# Altium PCB PCB1.PcbDoc
Units mm, origin at the board's own origin, x right, y up, seen from the top; angles counter-clockwise.
Board outline 150 x 150 mm, 2 copper layers (Top Layer, Bottom Layer); 67 components, 50 nets, 212 pads, 48 vias.
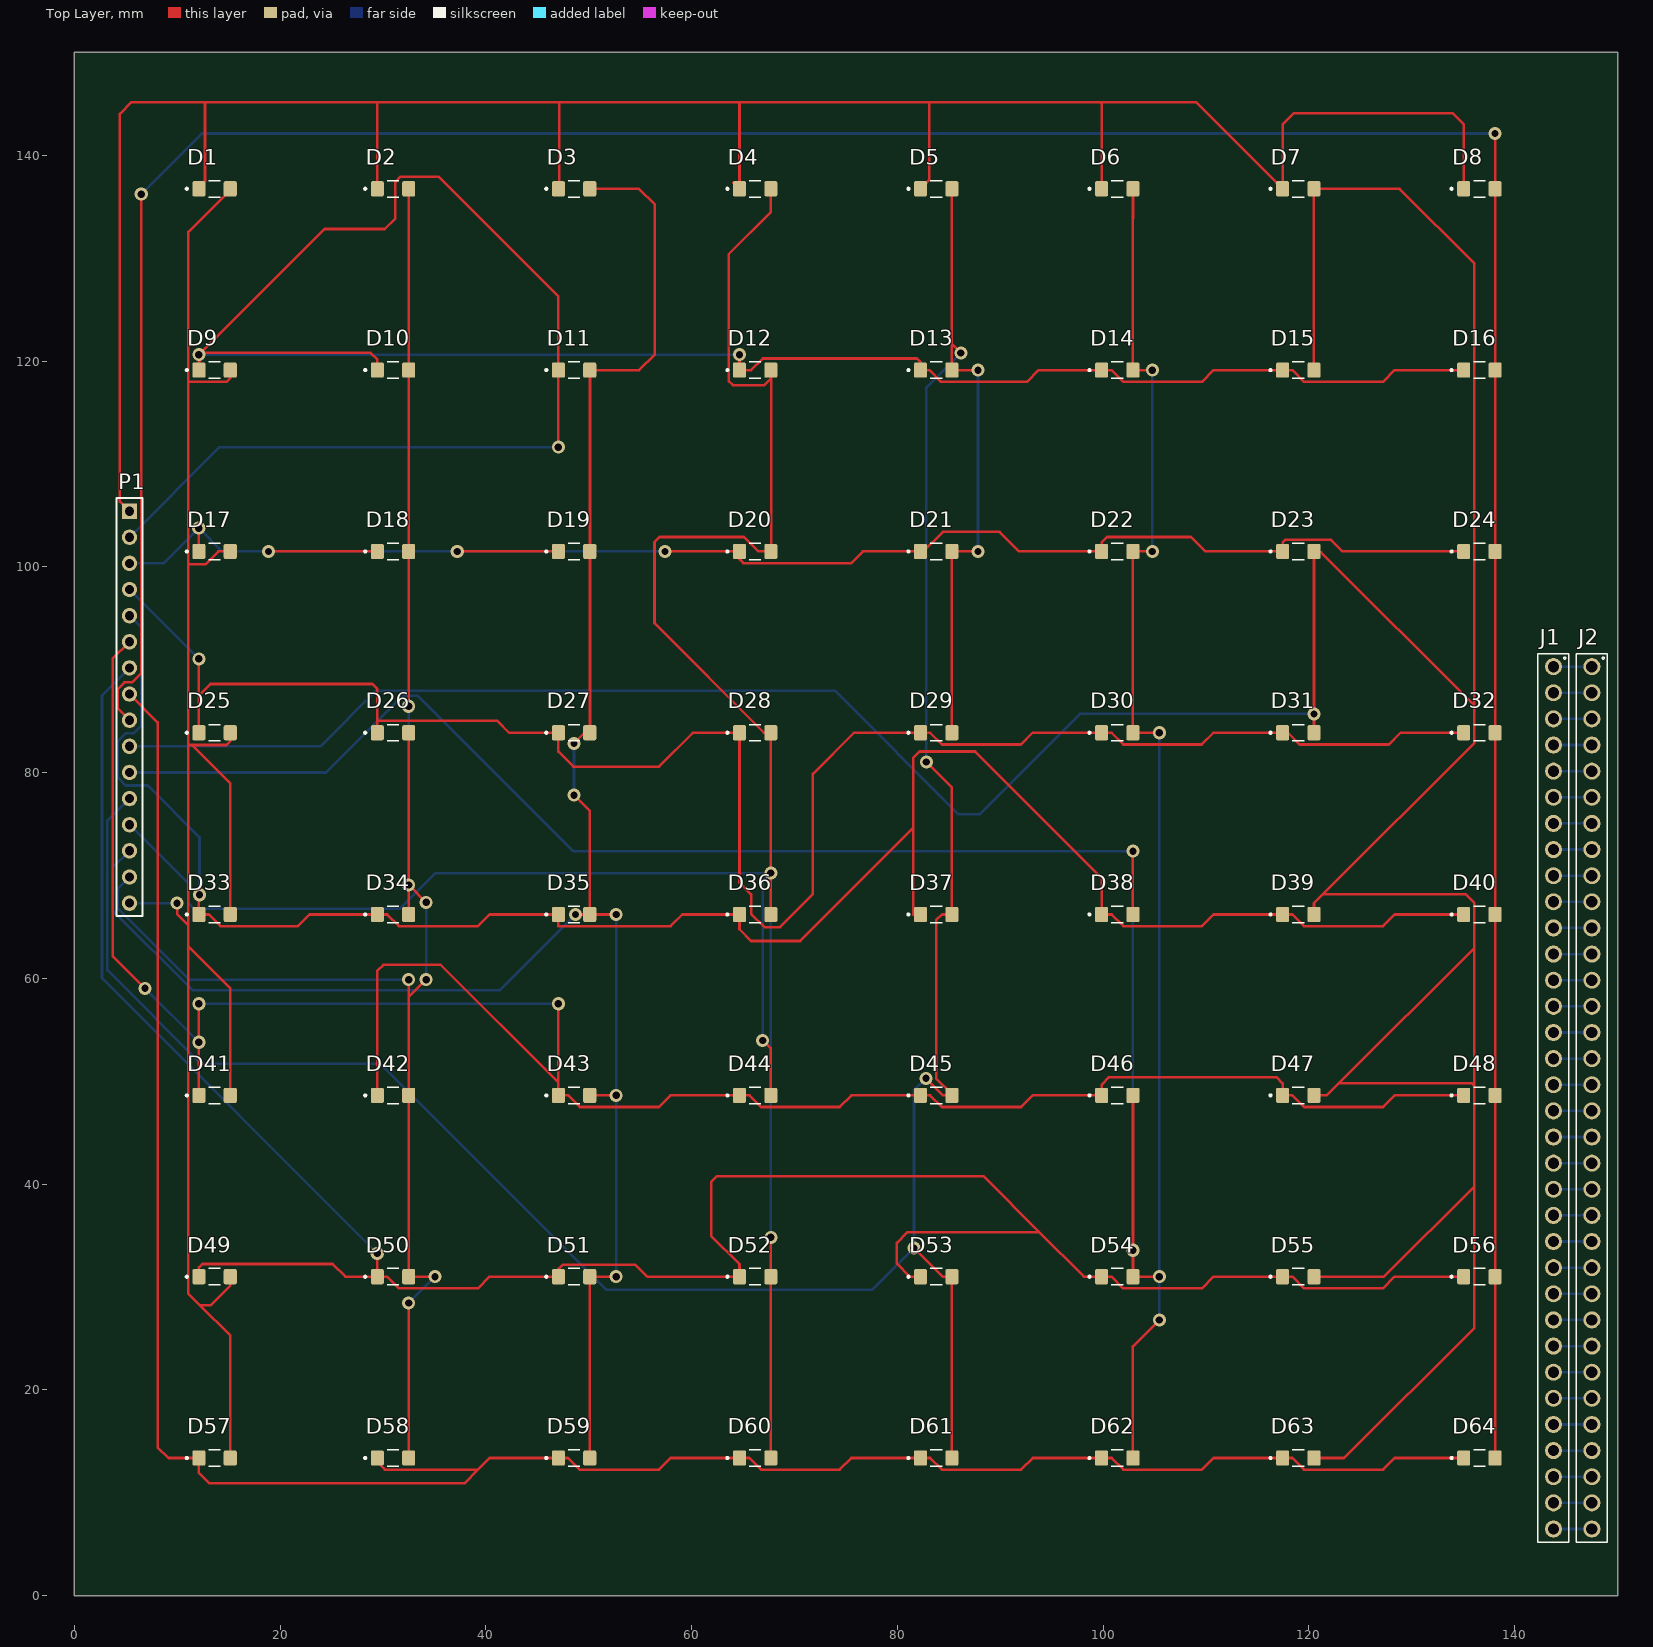
[diagram p0: Top Layer view]
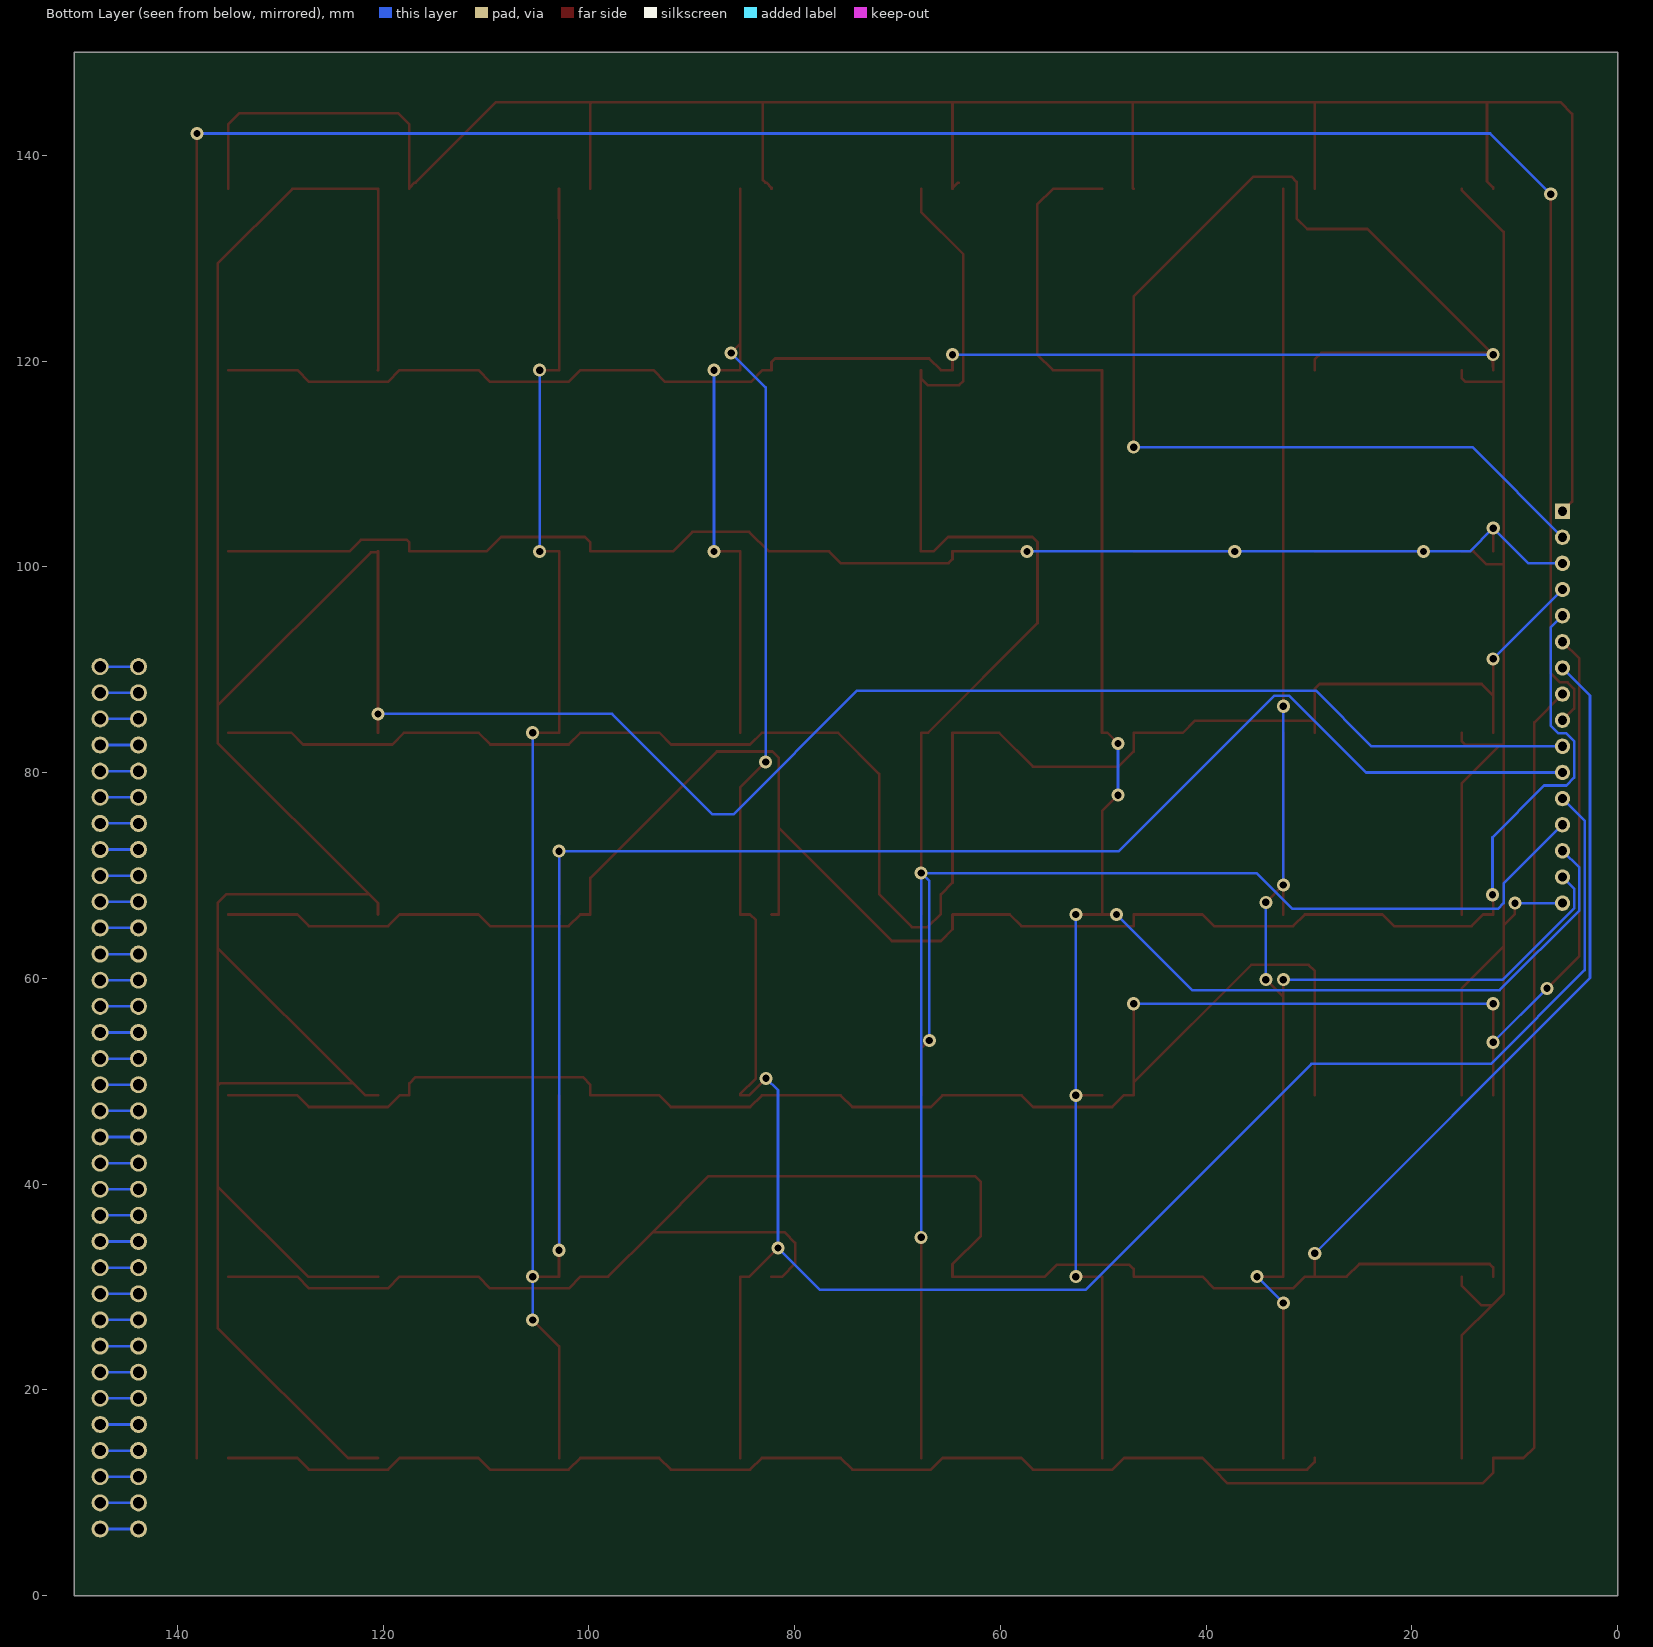
[diagram p1: Bottom Layer view, seen from below]
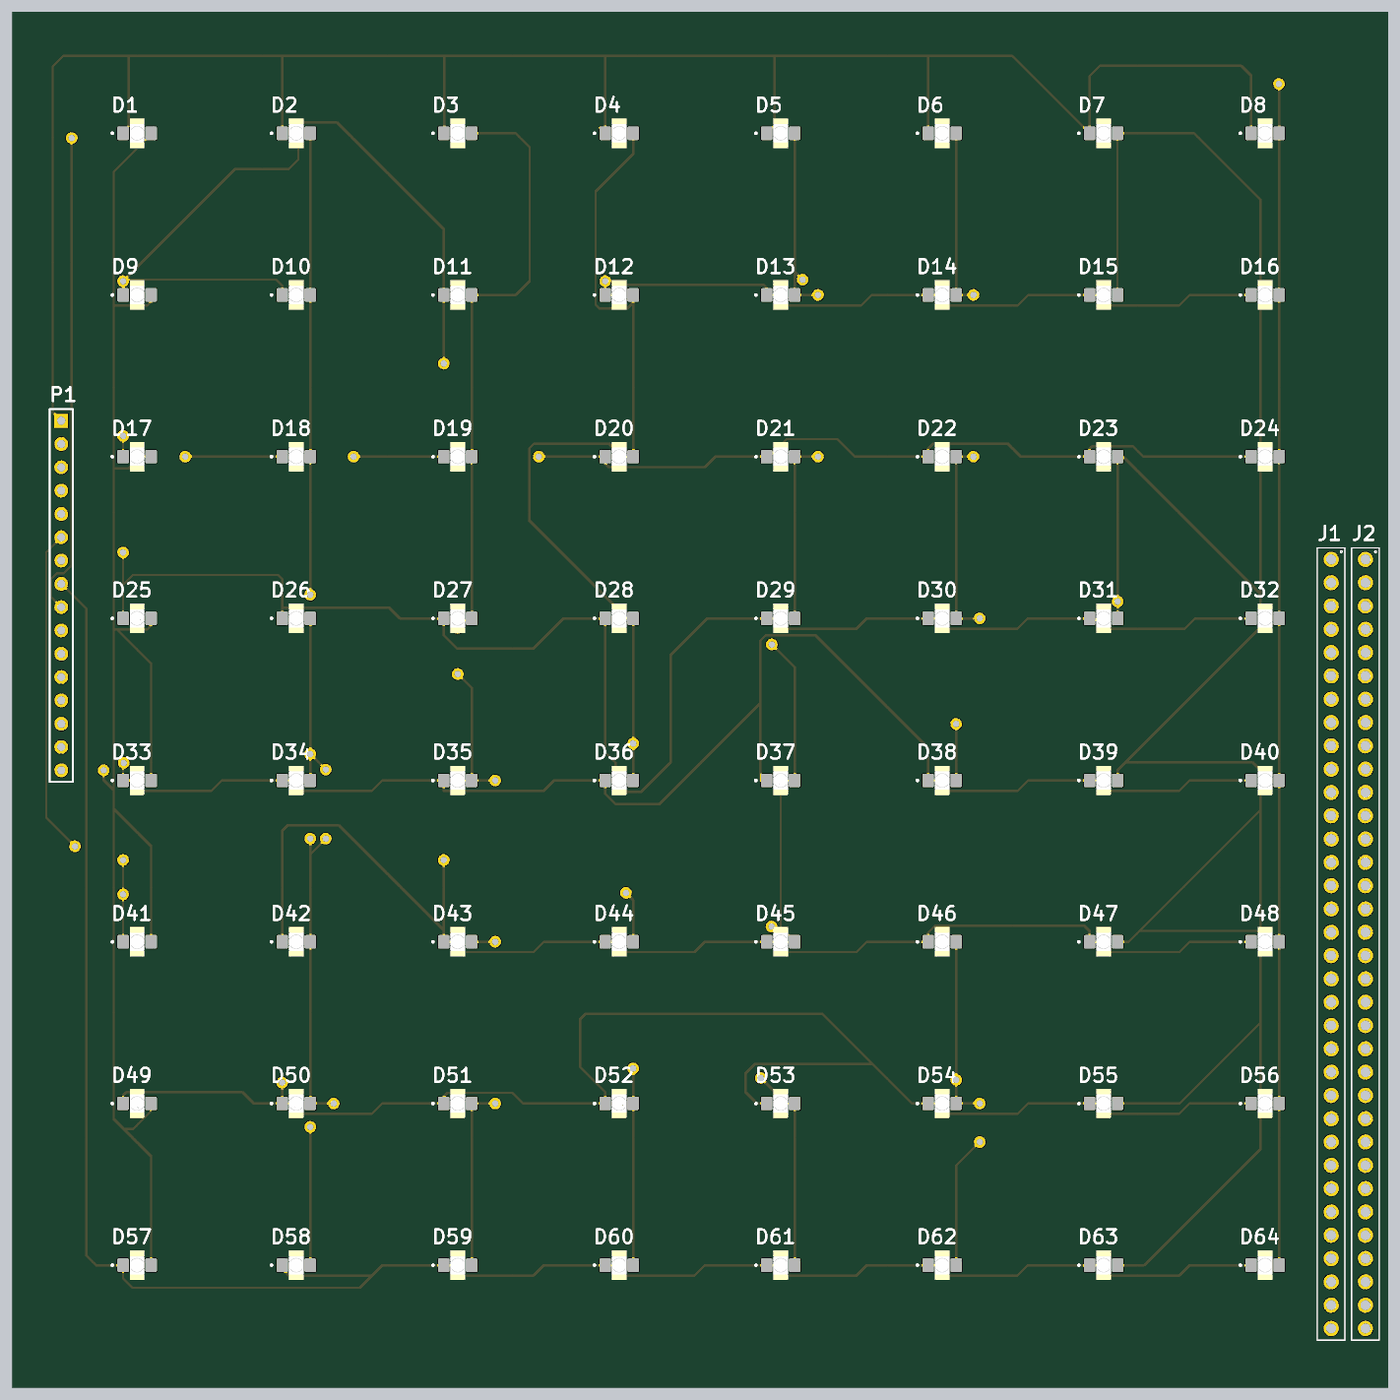
[diagram p2: 3D render of the assembled board from above, using the file's embedded part models]

## Layer stack, top to bottom
Top Solder: solder mask 0.0102, Solder Resist, Dk 3.5
Top Layer: signal copper 0.0356
Dielectric 1: dielectric 0.32, FR-4, Dk 4.8
Bottom Layer: signal copper 0.0356
Bottom Solder: solder mask 0.0102, Solder Resist, Dk 3.5

## Board outline
0,0 0,150 150,150 150,0

## Design rules (kind name [scope] priority, off if disabled: settings)
Clearance [All] p1: gap=0.254 ignorepadtopadclearanceinfootprint=FALSE except(0: Arc-Hole Track-Hole SMDPad-Hole THPad-Hole Via-Hole Fill-Hole Poly-Hole Region-Hole Text-Hole)
PolygonConnect [All] p1: connectstyle=Relief reliefconductorwidth=0.254 reliefentries=4 polygonreliefangle="90 Angle" airgapwidth=0.254
RoutingVias [All] p1: holewidth=0.711 width=1.27 viastyle="Through Hole" minholewidth=0.711 minwidth=1.27 maxholewidth=0.711 maxwidth=1.27
SolderMaskExpansion [All] p1: expansion=0.102 istentingtop=FALSE
Width [All] p1: maxlimit=0.254 minlimit=0.254 preferedwidth=0.254
30 further rules are at their usual default settings.

## Components (designator, comment, footprint, x,y, rotation, side; value= is the part's Value field where it differs from the comment)
D1 "598-8210-102F" LEDSC160X320X90-2N 13.626,136.74 r0 top
D2 "598-8210-102F" LEDSC160X320X90-2N 30.971,136.74 r0 top
D3 "598-8210-102F" LEDSC160X320X90-2N 48.569,136.74 r0 top
D4 "598-8210-102F" LEDSC160X320X90-2N 66.168,136.74 r0 top
D5 "598-8210-102F" LEDSC160X320X90-2N 83.766,136.74 r0 top
D6 "598-8210-102F" LEDSC160X320X90-2N 101.365,136.74 r0 top
D7 "598-8210-102F" LEDSC160X320X90-2N 118.963,136.74 r0 top
D8 "598-8210-102F" LEDSC160X320X90-2N 136.562,136.74 r0 top
D9 "598-8210-102F" LEDSC160X320X90-2N 13.626,119.116 r0 top
D10 "598-8210-102F" LEDSC160X320X90-2N 30.971,119.116 r0 top
D11 "598-8210-102F" LEDSC160X320X90-2N 48.569,119.116 r0 top
D12 "598-8210-102F" LEDSC160X320X90-2N 66.168,119.116 r0 top
D13 "598-8210-102F" LEDSC160X320X90-2N 83.766,119.116 r0 top
D14 "598-8210-102F" LEDSC160X320X90-2N 101.365,119.116 r0 top
D15 "598-8210-102F" LEDSC160X320X90-2N 118.963,119.116 r0 top
D16 "598-8210-102F" LEDSC160X320X90-2N 136.562,119.116 r0 top
D17 "598-8210-102F" LEDSC160X320X90-2N 13.626,101.493 r0 top
D18 "598-8210-102F" LEDSC160X320X90-2N 30.971,101.493 r0 top
D19 "598-8210-102F" LEDSC160X320X90-2N 48.569,101.493 r0 top
D20 "598-8210-102F" LEDSC160X320X90-2N 66.168,101.493 r0 top
D21 "598-8210-102F" LEDSC160X320X90-2N 83.766,101.493 r0 top
D22 "598-8210-102F" LEDSC160X320X90-2N 101.365,101.493 r0 top
D23 "598-8210-102F" LEDSC160X320X90-2N 118.963,101.493 r0 top
D24 "598-8210-102F" LEDSC160X320X90-2N 136.562,101.493 r0 top
D25 "598-8210-102F" LEDSC160X320X90-2N 13.626,83.869 r0 top
D26 "598-8210-102F" LEDSC160X320X90-2N 30.971,83.869 r0 top
D27 "598-8210-102F" LEDSC160X320X90-2N 48.569,83.869 r0 top
D28 "598-8210-102F" LEDSC160X320X90-2N 66.168,83.869 r0 top
D29 "598-8210-102F" LEDSC160X320X90-2N 83.766,83.869 r0 top
D30 "598-8210-102F" LEDSC160X320X90-2N 101.365,83.869 r0 top
D31 "598-8210-102F" LEDSC160X320X90-2N 118.963,83.869 r0 top
D32 "598-8210-102F" LEDSC160X320X90-2N 136.562,83.869 r0 top
D33 "598-8210-102F" LEDSC160X320X90-2N 13.626,66.207 r0 top
D34 "598-8210-102F" LEDSC160X320X90-2N 30.971,66.207 r0 top
D35 "598-8210-102F" LEDSC160X320X90-2N 48.569,66.207 r0 top
D36 "598-8210-102F" LEDSC160X320X90-2N 66.168,66.207 r0 top
D37 "598-8210-102F" LEDSC160X320X90-2N 83.766,66.207 r0 top
D38 "598-8210-102F" LEDSC160X320X90-2N 101.365,66.207 r0 top
D39 "598-8210-102F" LEDSC160X320X90-2N 118.963,66.207 r0 top
D40 "598-8210-102F" LEDSC160X320X90-2N 136.562,66.207 r0 top
D41 "598-8210-102F" LEDSC160X320X90-2N 13.626,48.622 r0 top
D42 "598-8210-102F" LEDSC160X320X90-2N 30.971,48.622 r0 top
D43 "598-8210-102F" LEDSC160X320X90-2N 48.569,48.622 r0 top
D44 "598-8210-102F" LEDSC160X320X90-2N 66.168,48.622 r0 top
D45 "598-8210-102F" LEDSC160X320X90-2N 83.766,48.622 r0 top
D46 "598-8210-102F" LEDSC160X320X90-2N 101.365,48.622 r0 top
D47 "598-8210-102F" LEDSC160X320X90-2N 118.963,48.622 r0 top
D48 "598-8210-102F" LEDSC160X320X90-2N 136.562,48.622 r0 top
D49 "598-8210-102F" LEDSC160X320X90-2N 13.626,30.998 r0 top
D50 "598-8210-102F" LEDSC160X320X90-2N 30.971,30.998 r0 top
D51 "598-8210-102F" LEDSC160X320X90-2N 48.569,30.998 r0 top
D52 "598-8210-102F" LEDSC160X320X90-2N 66.168,30.998 r0 top
D53 "598-8210-102F" LEDSC160X320X90-2N 83.766,30.998 r0 top
D54 "598-8210-102F" LEDSC160X320X90-2N 101.365,30.998 r0 top
D55 "598-8210-102F" LEDSC160X320X90-2N 118.963,30.998 r0 top
D56 "598-8210-102F" LEDSC160X320X90-2N 136.562,30.998 r0 top
D57 "598-8210-102F" LEDSC160X320X90-2N 13.626,13.375 r0 top
D58 "598-8210-102F" LEDSC160X320X90-2N 30.971,13.375 r0 top
D59 "598-8210-102F" LEDSC160X320X90-2N 48.569,13.375 r0 top
D60 "598-8210-102F" LEDSC160X320X90-2N 66.168,13.375 r0 top
D61 "598-8210-102F" LEDSC160X320X90-2N 83.766,13.375 r0 top
D62 "598-8210-102F" LEDSC160X320X90-2N 101.365,13.375 r0 top
D63 "598-8210-102F" LEDSC160X320X90-2N 118.963,13.375 r0 top
D64 "598-8210-102F" LEDSC160X320X90-2N 136.562,13.375 r0 top
J1 "61303411021" 61303411021 143.764,48.387 r90 top
J2 "61303411021" 61303411021 147.5,48.387 r90 top
P1 "Header 16" HDR1X16 5.361,105.41 r270 top

## Footprints (in the part's own frame and the unit in brackets; to place one, negate y for a bottom-side part, rotate by r counter-clockwise, add the part's x,y. Pads: shape width x height; smd on the part's side, far side on the other; paste and mask are expansions set on the pad)
61303411021 [mm]
  round 1.65 hole 1.1: 1(41.91,0) 2(39.37,0) 3(36.83,0) 4(34.29,0) 5(31.75,0) 6(29.21,0) 7(26.67,0) 8(24.13,0) 9(21.59,0) 10(19.05,0) 11(16.51,0) 12(13.97,0) 13(11.43,0) 14(8.89,0) 15(6.35,0) 16(3.81,0) 17(1.27,0) 18(-1.27,0) 19(-3.81,0) 20(-6.35,0) 21(-8.89,0) 22(-11.43,0) 23(-13.97,0) 24(-16.51,0) 25(-19.05,0) 26(-21.59,0) 27(-24.13,0) 28(-26.67,0) 29(-29.21,0) 30(-31.75,0) 31(-34.29,0) 32(-36.83,0) 33(-39.37,0) 34(-41.91,0)
  silkscreen extent -43.18,-1.5 43.18,1.52
HDR1X16 [mm] "Connector; Header; 16 Position"
  rect 1.5x1.5 hole 0.9: 1(0,0)
  round 1.5 hole 0.9: 2(2.54,0) 3(5.08,0) 4(7.62,0) 5(10.16,0) 6(12.7,0) 7(15.24,0) 8(17.78,0) 9(20.32,0) 10(22.86,0) 11(25.4,0) 12(27.94,0) 13(30.48,0) 14(33.02,0) 15(35.56,0) 16(38.1,0)
  silkscreen extent -1.27,-1.27 39.37,1.27
LEDSC160X320X90-2N [mm]
  rrect25% 1.27x1.48 smd: A(1.525,0) C(-1.525,0)
  silkscreen extent -2.8,-0.8 0.57,0.8, body extent -0.8,-1.6 0.8,1.6, height 1.09

## Part data
D1 D2 D3 D4 D5 D6 D7 D8 D9 D10 D11 D12 D13 D14 D15 D16 D17 D18 D19 D20 D21 D22 D23 D24 D25 D26 D27 D28 D29 D30 D31 D32 D33 D34 D35 D36 D37 D38 D39 D40 D41 D42 D43 D44 D45 D46 D47 D48 D49 D50 D51 D52 D53 D54 D55 D56 D57 D58 D59 D60 D61 D62 D63 D64: "Red 635nm LED Indication - Discrete 2V 1206 (3216 Metric)", Package=None, Availability=Unavailable, MF="{'manufacturer': u'Dialight'}", MP=598-8210-102F, Price=None
J1 J2: "<b> WR-PHD 2.54mm Angled Pin Header, 34 Pins/<b>=>Con_BTB_PHD_2.54_1_THT_61303411021 <br><a href=\"http://katalog.we-online.de/media/images/eican/Con_BTB_PHD_2.54_1_THT_61303211021_pf2.jpg\" title=\"Enlarge picture\"> <img src=\"http://katalog.we-online.de/media/thumbs2/eican/thb_Con_BTB_PHD_2.54_1_THT_61303211021_pf2.jpg\" width=\"320\"></a><p> Details see: <a href=\"http://katalog.we-online.de/en/em/613_0xx_110_21\">http://katalog.we-online.de/en/em/613_0xx_110_21</a><p> Created 2014-05-29, Karrer Zheng<br> 2014 (C) WÃ¼rth Elektronik", Package=None, Availability=Unavailable, MF="{'manufacturer': u'W\xfcrth Elektronik'}", MP=61303411021, Price=None
P1: "Header, 16-Pin", LatestRevisionDate=17-Jul-2002, LatestRevisionNote="Re-released for DXP Platform.", Publisher="Altium Limited"

## Via types
v1: diameter 1.27, hole 0.711, Top Layer to Bottom Layer, 48 vias

## Nets (pads, with @x,y where several pads share a name; then routed paths per layer and width w, separated by ;. In a path a pad name is that pad's centre, name@x,y a point inside that pad or via, vN(x,y) a via of type N, cw(c..) or ccw(c..) an arc to the next point about the centre after c; other vN are vias at no path point)
C0: D1.A D9.A D17.A D25.A D33.A D41.A D49.A D57.A P1.16 | length 187.4
  Top Layer w0.254: v1(9.982,67.31) 9.982,66.23 11.074,65.138 ; D57.A 15.151,25.26 12.192,28.219 ; D49.A 15.151,30.162 13.208,28.219 12.192,28.219 ; D41.A 15.151,59.03 11.074,63.106 ; D33.A 15.151,78.956 11.43,82.677 ; D25.A 15.151,83.058 14.77,82.677 11.43,82.677 ; D17.A 13.995,101.493 12.731,100.228 11.074,100.228 ; D9.A 15.151,118.364 14.77,117.983 11.074,117.983 ; D1.A 15.151,136.635 11.074,132.558 11.074,117.983 ; 11.074,63.106 11.074,65.138 ; 11.074,63.106 11.074,29.337 12.192,28.219 ; 11.074,65.138 11.074,82.677 ; 11.074,82.677 11.43,82.677 ; 11.074,82.677 11.074,100.228 ; 11.074,100.228 11.074,117.983
  Bottom Layer w0.254: P1.16 v1(9.982,67.31)
C1: D2.A D10.A D18.A D26.A D34.A D42.A D50.A D58.A P1.15 | length 200.5
  Top Layer w0.254: D58.A v1(32.496,28.442) ; v1(32.496,59.868) 32.496,58.175 ; v1(32.496,86.446) 32.496,100.498 D18.A D10.A 32.512,119.116 32.512,136.74 D2.A ; v1(34.188,59.868) 32.496,58.175 ; v1(34.188,67.386) v1@32.512,69.063 ; v1(35.052,30.998) D50.A D42.A 32.496,58.175 ; v1(32.496,69.079) v1@32.512,69.063 ; v1(32.496,69.079) D26.A 32.512,83.869 v1@32.512,69.063 ; v1(32.496,69.079) 32.496,68.748 D34.A 32.512,66.207 v1@32.512,69.063
  Bottom Layer w0.254: P1.15 4.23,68.719 4.23,66.802 11.164,59.868 v1(32.496,59.868) ; v1(32.496,28.442) v1(35.052,30.998) ; v1(32.496,86.446) v1(32.496,69.079) 32.496,68.748 v1@32.512,68.732 ; v1(34.188,59.868) v1(34.188,67.386)
C2: D3.A D11.A D19.A D27.A D35.A D43.A D51.A D59.A P1.14 | length 202.6
  Top Layer w0.254: v1(48.565,77.8) 50.094,76.271 D35.A ; v1(48.565,82.828) 49.606,83.869 D27.A 50.114,83.869 D19.A@50.114,101.493 ; v1(48.706,66.207) D35.A ; D59.A D51.A v1(52.654,30.998) ; D43.A v1(52.654,48.622) ; D19.A D19.A@50.114,101.493 ; D11.A D11.A@50.114,119.116 ; D3.A 54.864,136.74 56.413,135.191 56.413,120.65 54.879,119.116 D11.A@50.114,119.116 ; v1(52.654,66.207) D35.A ; D19.A@50.114,101.493 D11.A@50.114,119.116
  Bottom Layer w0.254: P1.14 3.722,70.751 3.722,66.592 11.462,58.852 41.351,58.852 v1(48.706,66.207) ; v1(48.565,77.8) v1(48.565,82.828) ; v1(52.654,30.998) v1(52.654,48.622) v1(52.654,66.207)
C3: D4.A D12.A D20.A D28.A D36.A D44.A D52.A D60.A P1.13 | length 244.1
  Top Layer w0.254: v1(66.904,53.952) 67.693,53.162 D44.A ; D60.A D52.A v1(67.693,34.821) ; D36.A 67.693,69.442 v1(67.693,70.231) D28.A 67.032,83.869 56.388,94.513 56.388,102.387 56.896,102.895 65.069,102.895 66.472,101.493 D20.A 67.716,101.493 67.716,119.116 D12.A 67.693,118.29 67.056,117.653 64.008,117.653 63.602,118.059 63.602,130.378 67.693,134.47 D4.A
  Bottom Layer w0.254: P1.13 11.074,69.217 11.074,67.31 11.633,66.751 31.623,66.751 35.103,70.231 v1(67.693,70.231) ; v1(66.904,53.952) 66.904,69.442 v1(67.693,70.231) ; v1(67.693,34.821) v1(67.693,70.231)
C4: D5.A D13.A D21.A D29.A D37.A D45.A D53.A D61.A P1.12 | length 303.8
  Top Layer w0.254: v1(81.61,33.782) 84.394,30.998 D53.A 85.293,30.998 85.293,13.375 D61.A ; v1(82.769,50.283) 84.43,48.622 D45.A 85.291,48.743 83.769,50.264 83.769,65.648 84.328,66.207 D37.A 85.291,78.539 v1(82.804,81.026) ; D29.A 85.293,83.869 D21.A@85.293,101.493 ; D21.A D21.A@85.293,101.493 ; D13.A D13.A@85.293,119.116 ; v1(86.157,120.777) 85.293,121.641 ; v1(87.833,101.493) D21.A@85.293,101.493 ; v1(87.833,119.116) D13.A@85.293,119.116 ; D13.A@85.293,119.116 85.293,121.641 ; 85.293,121.641 D5.A 85.291,121.643 85.293,121.641
  Bottom Layer w0.254: P1.12 3.214,75.323 3.214,60.794 12.319,51.689 29.769,51.689 51.74,29.718 77.546,29.718 v1(81.61,33.782) 81.61,49.124 v1(82.769,50.283) ; v1(82.804,81.026) 82.804,117.424 v1(86.157,120.777) ; v1(87.833,101.493) v1(87.833,119.116)
C5: D6.A D14.A D22.A D30.A D38.A D46.A D54.A D62.A P1.11 | length 305.4
  Top Layer w0.254: D62.A 102.89,24.226 v1(105.461,26.797) ; v1(102.89,33.569) D54.A D54.A@102.895,30.998 ; D46.A 102.895,48.622 D54.A@102.895,30.998 ; D38.A v1(102.89,72.365) ; D6.A 102.895,136.74 102.89,130.81 D14.A v1(104.775,119.116) ; v1(104.775,101.493) D22.A D30.A v1(105.461,83.869) ; v1(105.461,30.998) D54.A@102.895,30.998
  Bottom Layer w0.254: P1.11 24.46,80.01 31.912,87.462 33.392,87.462 48.489,72.365 v1(102.89,72.365) v1(102.89,33.569) ; v1(104.775,101.493) v1(104.775,119.116) ; v1(105.461,26.797) v1(105.461,30.998) v1(105.461,83.869)
C6: D7.A D15.A D23.A D31.A D39.A D47.A D55.A D63.A P1.10 | length 402.9
  Top Layer w0.254: D63.A 123.408,13.375 136.068,26.035 136.068,39.786 ; D55.A 127.279,30.998 136.068,39.786 ; D47.A 121.723,48.622 122.911,49.809 ; D39.A 120.488,67.31 121.352,68.174 ; D31.A v1(120.488,85.7) D23.A@120.488,101.397 ; D23.A D23.A@120.488,101.397 ; D15.A 120.472,119.116 120.472,136.627 120.488,136.627 D7.A 128.817,136.74 136.068,129.489 136.068,86.512 ; D23.A@120.488,101.397 121.183,101.397 136.068,86.512 ; 121.352,68.174 135.204,68.174 136.068,67.31 136.068,62.967 ; 121.352,68.174 136.068,82.89 136.068,86.512 ; 122.911,49.809 135.788,49.809 136.068,49.53 ; 122.911,49.809 136.068,62.967 ; 136.068,39.786 136.068,49.53 ; 136.068,49.53 136.068,62.967
  Bottom Layer w0.254: P1.10 23.901,82.55 29.321,87.97 73.93,87.97 85.954,75.946 87.986,75.946 97.739,85.7 v1(120.488,85.7)
C7: D8.A D16.A D24.A D32.A D40.A D48.A D56.A D64.A P1.9 | length 315.7
  Top Layer w0.254: P1.9 4.23,86.221 4.23,88.138 4.865,88.773 5.613,88.773 6.502,89.662 v1(6.502,136.22) ; v1(138.074,142.113) 138.087,142.1 D8.A D16.A D24.A D32.A D40.A D48.A D56.A D64.A
  Bottom Layer w0.254: v1(6.502,136.22) 12.395,142.113 v1(138.074,142.113)
NetJ1_1: J1.1 J2.1 | length 3.7
  Bottom Layer w0.254: J1.1 J2.1
NetJ1_2: J1.2 J2.2 | length 3.7
  Bottom Layer w0.254: J1.2 J2.2
NetJ1_3: J1.3 J2.3 | length 3.7
  Bottom Layer w0.254: J1.3 J2.3
NetJ1_4: J1.4 J2.4 | length 3.7
  Bottom Layer w0.254: J1.4 J2.4
NetJ1_5: J1.5 J2.5 | length 3.7
  Bottom Layer w0.254: J1.5 J2.5
NetJ1_6: J1.6 J2.6 | length 3.7
  Bottom Layer w0.254: J1.6 J2.6
NetJ1_7: J1.7 J2.7 | length 3.7
  Bottom Layer w0.254: J1.7 J2.7
NetJ1_8: J1.8 J2.8 | length 3.7
  Bottom Layer w0.254: J1.8 J2.8
NetJ1_9: J1.9 J2.9 | length 3.7
  Bottom Layer w0.254: J1.9 J2.9
NetJ1_10: J1.10 J2.10 | length 3.7
  Bottom Layer w0.254: J1.10 J2.10
NetJ1_11: J1.11 J2.11 | length 3.7
  Bottom Layer w0.254: J1.11 J2.11
NetJ1_12: J1.12 J2.12 | length 3.7
  Bottom Layer w0.254: J1.12 J2.12
NetJ1_13: J1.13 J2.13 | length 3.7
  Bottom Layer w0.254: J1.13 J2.13
NetJ1_14: J1.14 J2.14 | length 3.7
  Bottom Layer w0.254: J1.14 J2.14
NetJ1_15: J1.15 J2.15 | length 3.7
  Bottom Layer w0.254: J1.15 J2.15
NetJ1_16: J1.16 J2.16 | length 3.7
  Bottom Layer w0.254: J1.16 J2.16
NetJ1_17: J1.17 J2.17 | length 3.7
  Bottom Layer w0.254: J1.17 J2.17
NetJ1_18: J1.18 J2.18 | length 3.7
  Bottom Layer w0.254: J1.18 J2.18
NetJ1_19: J1.19 J2.19 | length 3.7
  Bottom Layer w0.254: J1.19 J2.19
NetJ1_20: J1.20 J2.20 | length 3.7
  Bottom Layer w0.254: J1.20 J2.20
NetJ1_21: J1.21 J2.21 | length 3.7
  Bottom Layer w0.254: J1.21 J2.21
NetJ1_22: J1.22 J2.22 | length 3.7
  Bottom Layer w0.254: J1.22 J2.22
NetJ1_23: J1.23 J2.23 | length 3.7
  Bottom Layer w0.254: J1.23 J2.23
NetJ1_24: J1.24 J2.24 | length 3.7
  Bottom Layer w0.254: J1.24 J2.24
NetJ1_25: J1.25 J2.25 | length 3.7
  Bottom Layer w0.254: J1.25 J2.25
NetJ1_26: J1.26 J2.26 | length 3.7
  Bottom Layer w0.254: J1.26 J2.26
NetJ1_27: J1.27 J2.27 | length 3.7
  Bottom Layer w0.254: J1.27 J2.27
NetJ1_28: J1.28 J2.28 | length 3.7
  Bottom Layer w0.254: J1.28 J2.28
NetJ1_29: J1.29 J2.29 | length 3.7
  Bottom Layer w0.254: J1.29 J2.29
NetJ1_30: J1.30 J2.30 | length 3.7
  Bottom Layer w0.254: J1.30 J2.30
NetJ1_31: J1.31 J2.31 | length 3.7
  Bottom Layer w0.254: J1.31 J2.31
NetJ1_32: J1.32 J2.32 | length 3.7
  Bottom Layer w0.254: J1.32 J2.32
NetJ1_33: J1.33 J2.33 | length 3.7
  Bottom Layer w0.254: J1.33 J2.33
NetJ1_34: J1.34 J2.34 | length 3.7
  Bottom Layer w0.254: J1.34 J2.34
R0: D1.C D2.C D3.C D4.C D5.C D6.C D7.C D8.C P1.1 | length 239.3
  Top Layer w0.254: P1.1 4.42,106.351 4.42,144.018 5.563,145.161 12.7,145.161 ; D1.C 12.101,136.862 12.7,137.461 12.7,145.161 ; 29.401,145.097 29.337,145.161 ; D2.C 29.446,145.052 ; D3.C 47.117,136.813 47.117,145.161 ; D4.C@64.05,137.333 64.137,137.333 64.643,136.828 D4.C 64.643,145.012 64.494,145.161 ; D5.C 82.241,136.828 82.747,137.333 82.834,137.333 83.085,137.584 83.085,145.161 ; 99.609,145.161 109.017,145.161 116.845,137.333 116.932,137.333 117.438,136.828 D7.C 117.438,143.002 118.53,144.094 133.96,144.094 135.037,143.017 D8.C ; D6.C 99.84,145.012 99.691,145.161 83.085,145.161 ; 12.7,145.161 29.337,145.161 ; 29.337,145.161 29.446,145.161 47.117,145.161 ; 47.117,145.161 55.22,145.161 64.494,145.161 ; 64.494,145.161 83.085,145.161
R1: D9.C D10.C D11.C D12.C D13.C D14.C D15.C D16.C P1.2 | length 259.3
  Top Layer w0.254: D10.C 29.446,120.142 28.8,120.788 v1@12.264,120.788 ; v1(47.044,111.633) D11.C 47.044,126.286 35.408,137.922 31.699,137.922 31.191,137.414 31.191,133.858 30.168,132.835 24.311,132.835 v1@12.264,120.788 ; v1(64.643,120.625) D12.C 65.786,119.116 66.914,120.244 81.885,120.244 82.241,119.888 D13.C 83.093,119.116 84.226,117.983 92.583,117.983 93.716,119.116 D14.C 100.823,119.116 101.956,117.983 109.586,117.983 110.719,119.116 D15.C 118.389,119.116 119.522,117.983 127.203,117.983 128.336,119.116 D16.C ; v1@12.264,120.788 12.247,120.61 D9.C v1(12.101,120.625) v1@12.264,120.788
  Bottom Layer w0.254: P1.2 14.124,111.633 v1(47.044,111.633) ; v1(12.101,120.625) v1(64.643,120.625)
R2: D17.C D18.C D19.C D20.C D21.C D22.C D23.C D24.C P1.3 | length 163
  Top Layer w0.254: v1(12.09,103.759) 12.09,101.493 D17.C v1(12.101,103.75) ; v1(18.872,101.493) D18.C ; v1(37.216,101.493) D19.C ; v1(57.404,101.493) D20.C 64.643,100.736 65.024,100.355 75.514,100.355 76.652,101.493 D21.C 82.499,101.493 84.41,103.403 89.916,103.403 91.826,101.493 D22.C 99.84,102.362 100.373,102.895 108.529,102.895 109.931,101.493 D23.C 117.438,102.362 117.692,102.616 122.149,102.616 123.272,101.493 D24.C
  Bottom Layer w0.254: P1.3 8.661,100.33 v1(12.09,103.759) ; v1(12.101,103.75) 14.358,101.493 v1(18.872,101.493) v1(37.216,101.493) v1(57.404,101.493)
R3: D25.C D26.C D27.C D28.C D29.C D30.C D31.C D32.C P1.4 | length 183.9
  Top Layer w0.254: D25.C 12.101,87.499 ; v1(12.101,91.05) 12.101,87.499 ; D26.C 29.446,85.042 ; D32.C 128.903,83.869 127.762,82.728 119.099,82.728 117.958,83.869 D31.C 110.719,83.869 109.577,82.728 101.956,82.728 100.814,83.869 D30.C 93.14,83.869 91.999,82.728 84.326,82.728 83.185,83.869 D29.C 75.768,83.869 71.78,79.881 71.78,68.174 68.58,64.973 67.056,64.973 65.786,66.243 65.786,68.148 64.643,69.291 D28.C 60.12,83.869 56.82,80.569 48.517,80.569 47.044,82.042 D27.C 42.267,83.869 41.095,85.042 29.446,85.042 ; 12.101,87.499 13.208,88.606 28.978,88.606 29.446,88.138 29.446,85.042
  Bottom Layer w0.254: P1.4 v1(12.101,91.05)
R4: D33.C D34.C D35.C D36.C D37.C D38.C D39.C D40.C P1.5 | length 195.1
  Top Layer w0.254: v1(12.167,68.123) 12.101,68.057 D33.C 13.066,66.207 14.199,65.075 21.728,65.075 22.86,66.207 D34.C 30.404,66.207 31.536,65.075 39.218,65.075 40.35,66.207 D35.C 47.044,65.075 57.952,65.075 59.084,66.207 D36.C 64.643,64.77 65.786,63.627 70.547,63.627 81.534,74.614 ; D37.C 81.534,66.207 81.534,74.614 ; D40.C 128.335,66.207 127.203,65.075 119.522,65.075 118.389,66.207 D39.C 110.719,66.207 109.586,65.075 101.956,65.075 100.823,66.207 D38.C 99.84,69.748 87.546,82.042 82.144,82.042 81.534,81.432 81.534,74.614
  Bottom Layer w0.254: P1.5 6.502,94.109 6.502,84.582 5.74,83.82 4.978,83.82 4.216,83.058 4.216,79.502 4.978,78.74 7.137,78.74 12.167,73.711 v1(12.167,68.123)
R5: D41.C D42.C D43.C D44.C D45.C D46.C D47.C D48.C P1.6 | length 225
  Top Layer w0.254: P1.6 3.722,91.071 3.722,62.166 v1(6.858,59.03) ; D41.C v1(12.101,53.787) v1(12.101,57.531) ; D42.C 29.446,60.739 30.023,61.316 35.611,61.316 47.044,49.882 ; v1(47.044,57.531) 47.044,49.882 ; D48.C 128.327,48.622 127.203,47.498 119.513,47.498 118.389,48.622 D47.C 117.438,49.796 116.84,50.394 100.584,50.394 99.84,49.65 D46.C 93.148,48.622 92.024,47.498 84.309,47.498 83.185,48.622 D45.C 75.514,48.622 74.39,47.498 66.751,47.498 65.627,48.622 D44.C 57.944,48.622 56.82,47.498 49.13,47.498 48.006,48.622 D43.C 47.044,49.882
  Bottom Layer w0.254: v1(6.858,59.03) v1(12.101,53.787) ; v1(12.101,57.531) v1(47.044,57.531)
R6: D49.C D50.C D51.C D52.C D53.C D54.C D55.C D56.C P1.7 | length 236.6
  Top Layer w0.254: D49.C 12.101,31.888 12.446,32.233 25.095,32.233 26.33,30.998 D50.C ; v1(29.439,33.274) 29.446,33.267 D50.C ; D53.C 81.194,30.998 79.934,32.258 79.934,34.29 80.95,35.306 93.802,35.306 ; D56.C 128.331,30.998 127.203,29.87 119.517,29.87 118.389,30.998 D55.C 110.719,30.998 109.591,29.87 101.93,29.87 100.803,30.998 D54.C 98.11,30.998 93.802,35.306 ; D50.C 30.404,30.998 31.531,29.87 39.218,29.87 40.345,30.998 D51.C 47.044,31.75 47.45,32.156 54.518,32.156 55.677,30.998 D52.C 64.643,32.233 61.9,34.976 61.9,40.183 62.484,40.767 88.341,40.767 93.802,35.306
  Bottom Layer w0.254: P1.7 2.686,87.495 2.686,60.027 v1(29.439,33.274)
R7: D57.C D58.C D59.C D60.C D61.C D62.C D63.C D64.C P1.8 | length 219.8
  Top Layer w0.254: P1.8 8.103,84.888 8.103,14.416 9.144,13.375 D57.C 12.101,11.938 13.117,10.922 37.897,10.922 39.218,12.243 ; D58.C 29.446,12.972 30.175,12.243 39.218,12.243 ; D64.C 128.335,13.375 127.203,12.243 119.522,12.243 118.389,13.375 D63.C 110.719,13.375 109.586,12.243 101.956,12.243 100.823,13.375 D62.C 93.156,13.375 92.024,12.243 84.317,12.243 83.185,13.375 D61.C 75.514,13.375 74.382,12.243 66.751,12.243 65.619,13.375 D60.C 57.952,13.375 56.82,12.243 49.113,12.243 47.981,13.375 D59.C 40.35,13.375 39.218,12.243

## Silkscreen, mask and mechanical layers (free items; w line width, h text height)
Mechanical 1:
  the board outline again, w0.254